# Altium PCB R20_PCBM.PcbDoc
Units mm, origin at the board's own origin, x right, y up, seen from the top; angles counter-clockwise.
Board outline 52 x 52 mm, 4 copper layers (Top Layer, Mid-Layer 1, Mid-Layer 2, Bottom Layer); 6 components, 2 nets, 22 pads, 245 vias.
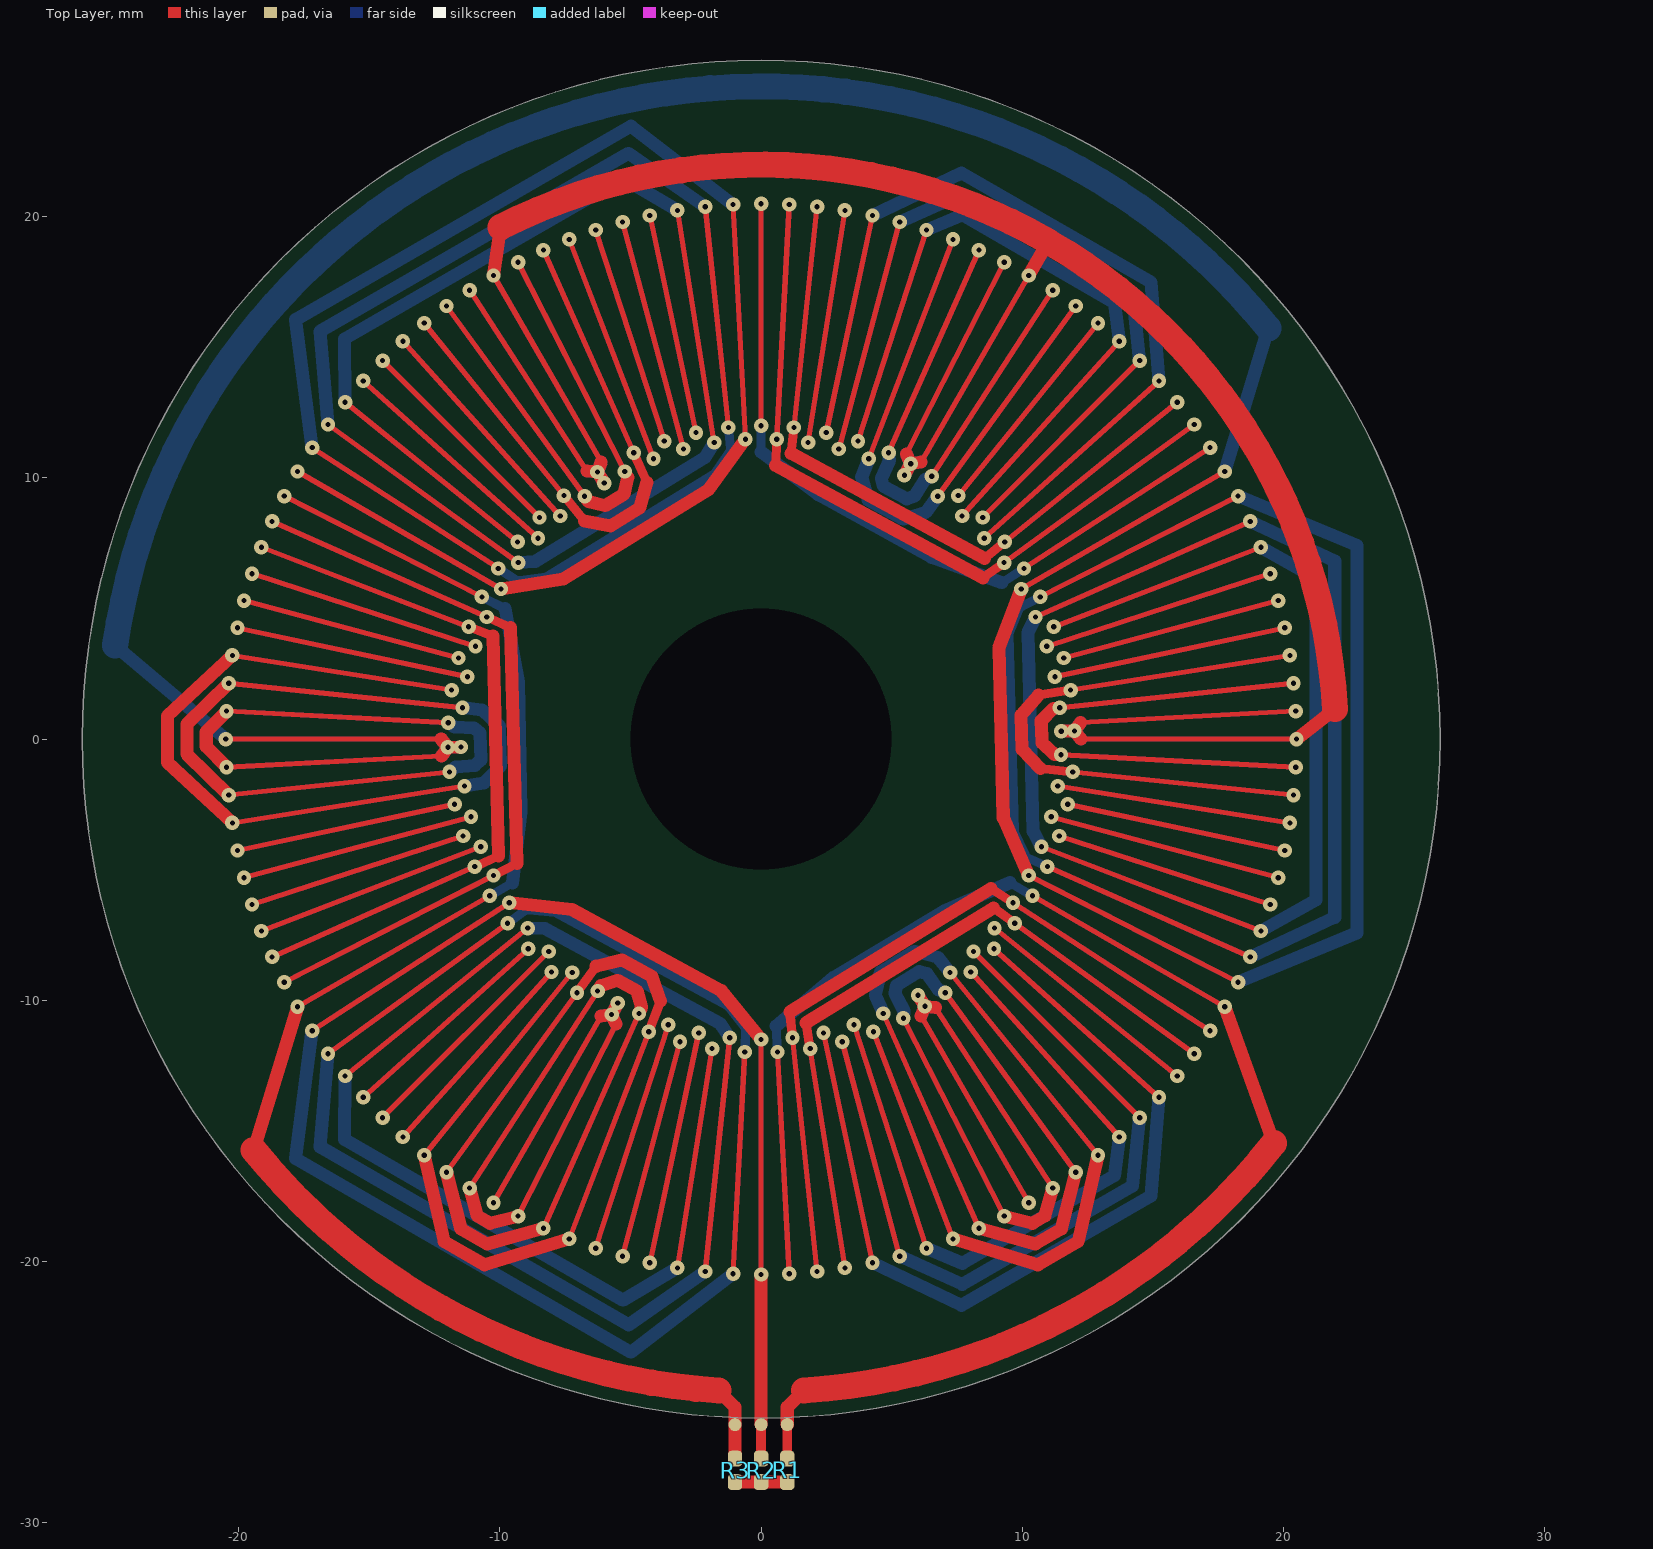
[diagram p0: Top Layer view]
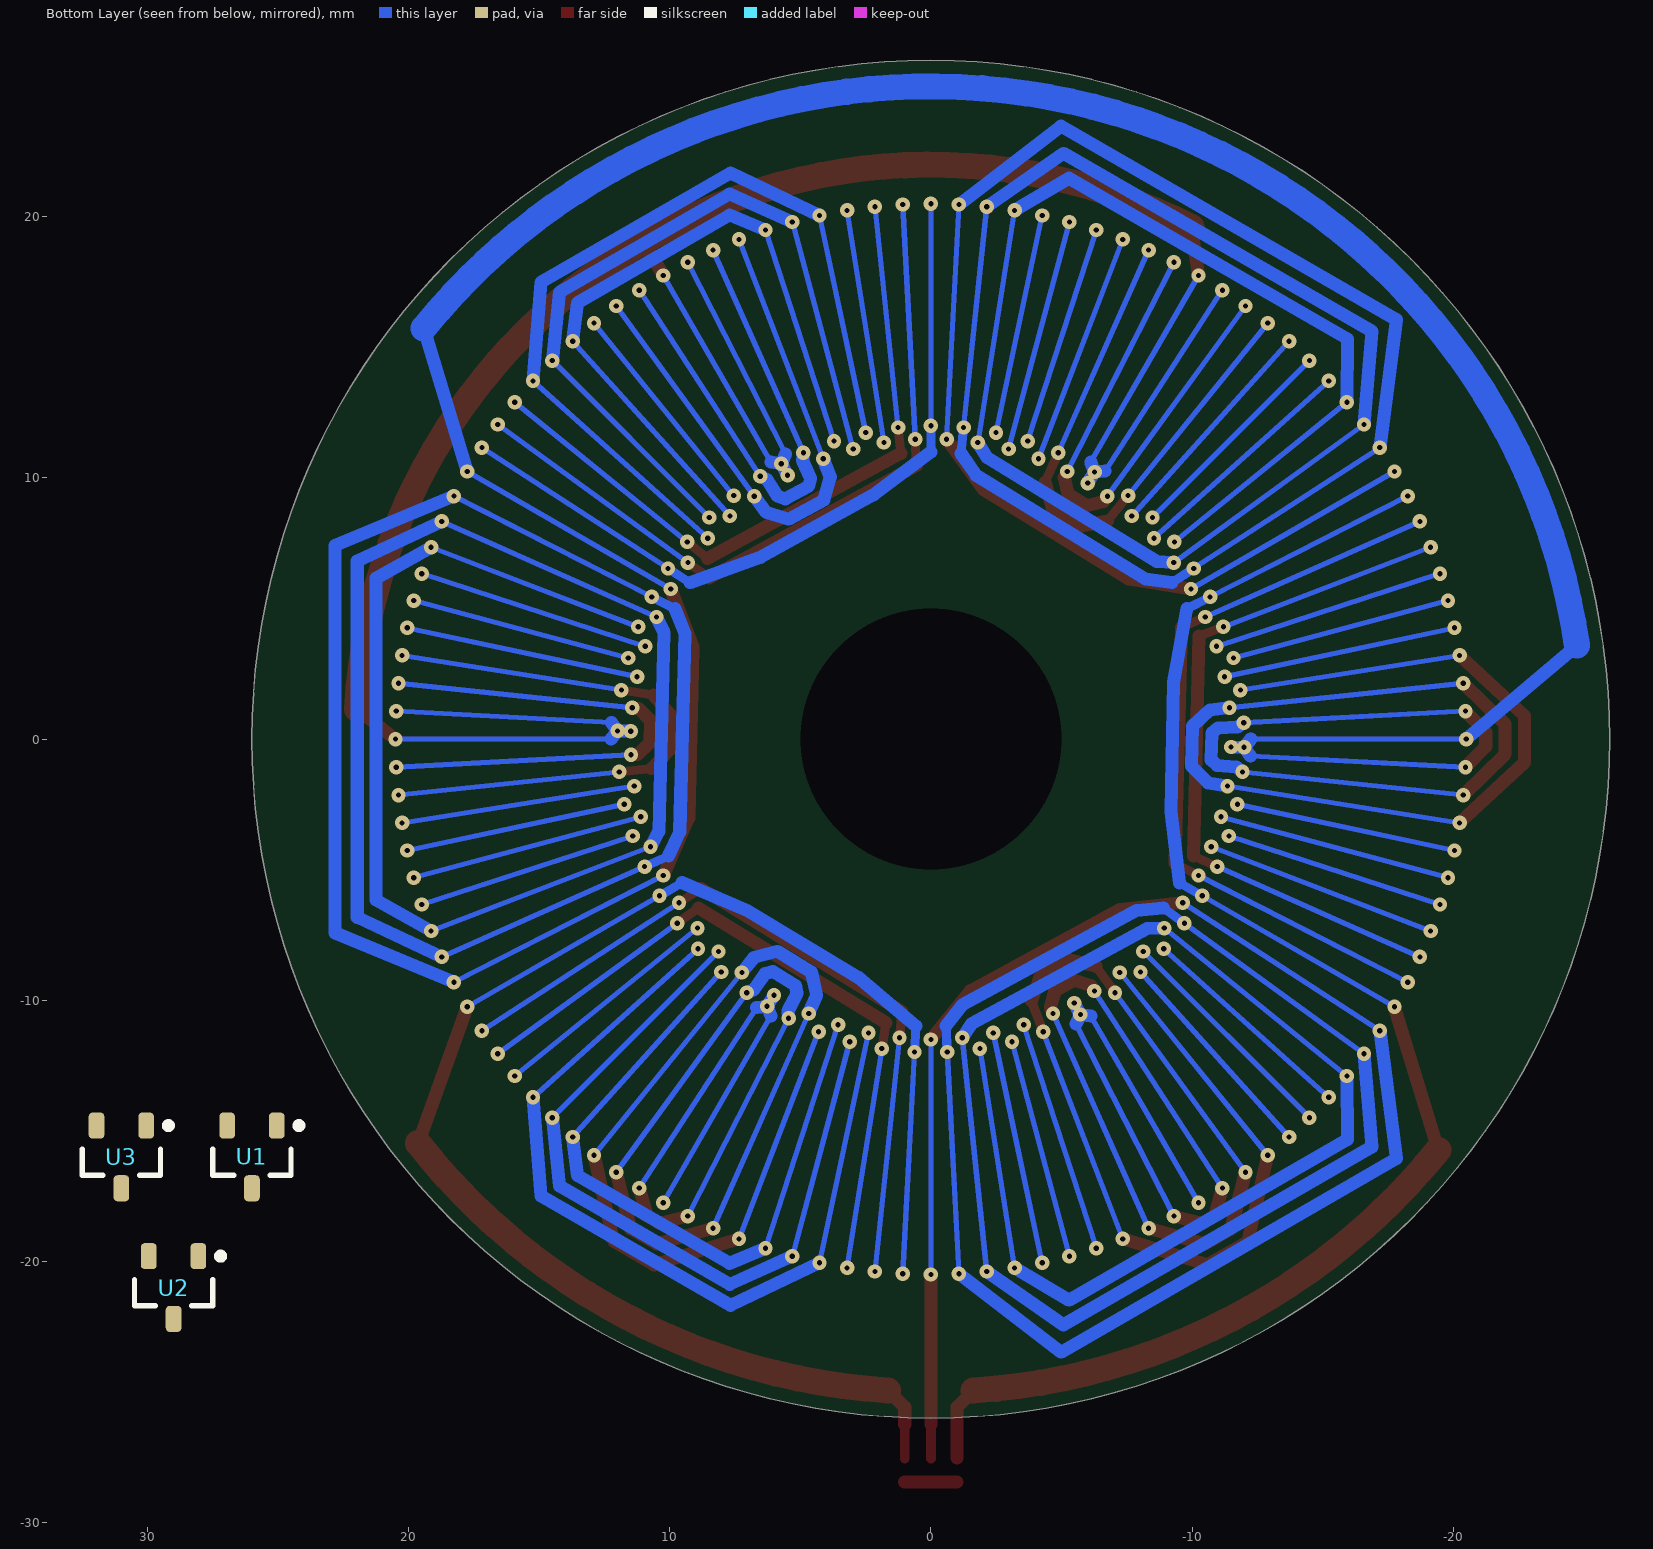
[diagram p1: Bottom Layer view, seen from below]
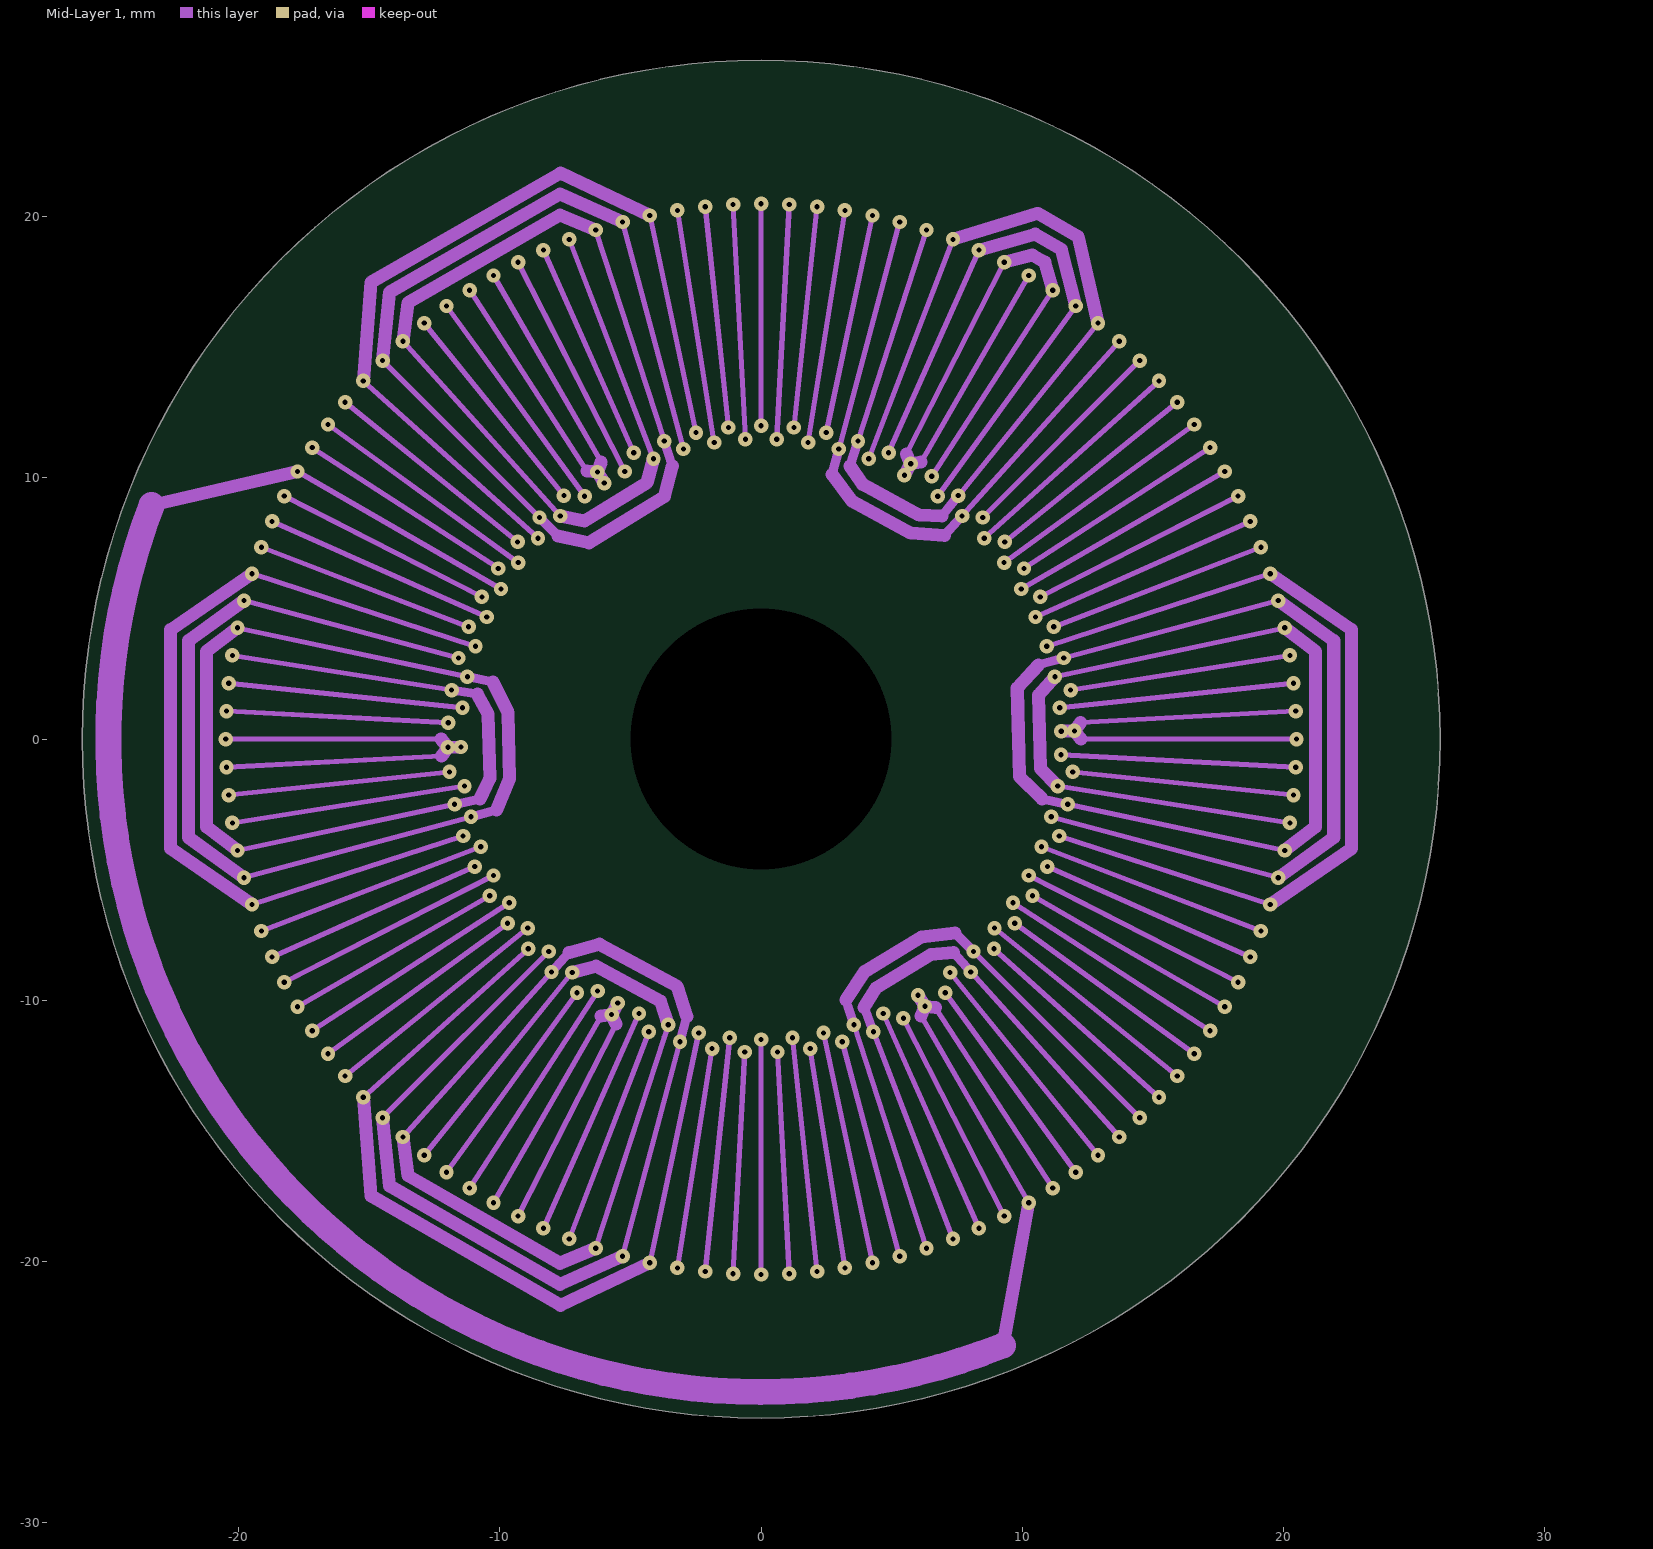
[diagram p2: Mid-Layer 1]
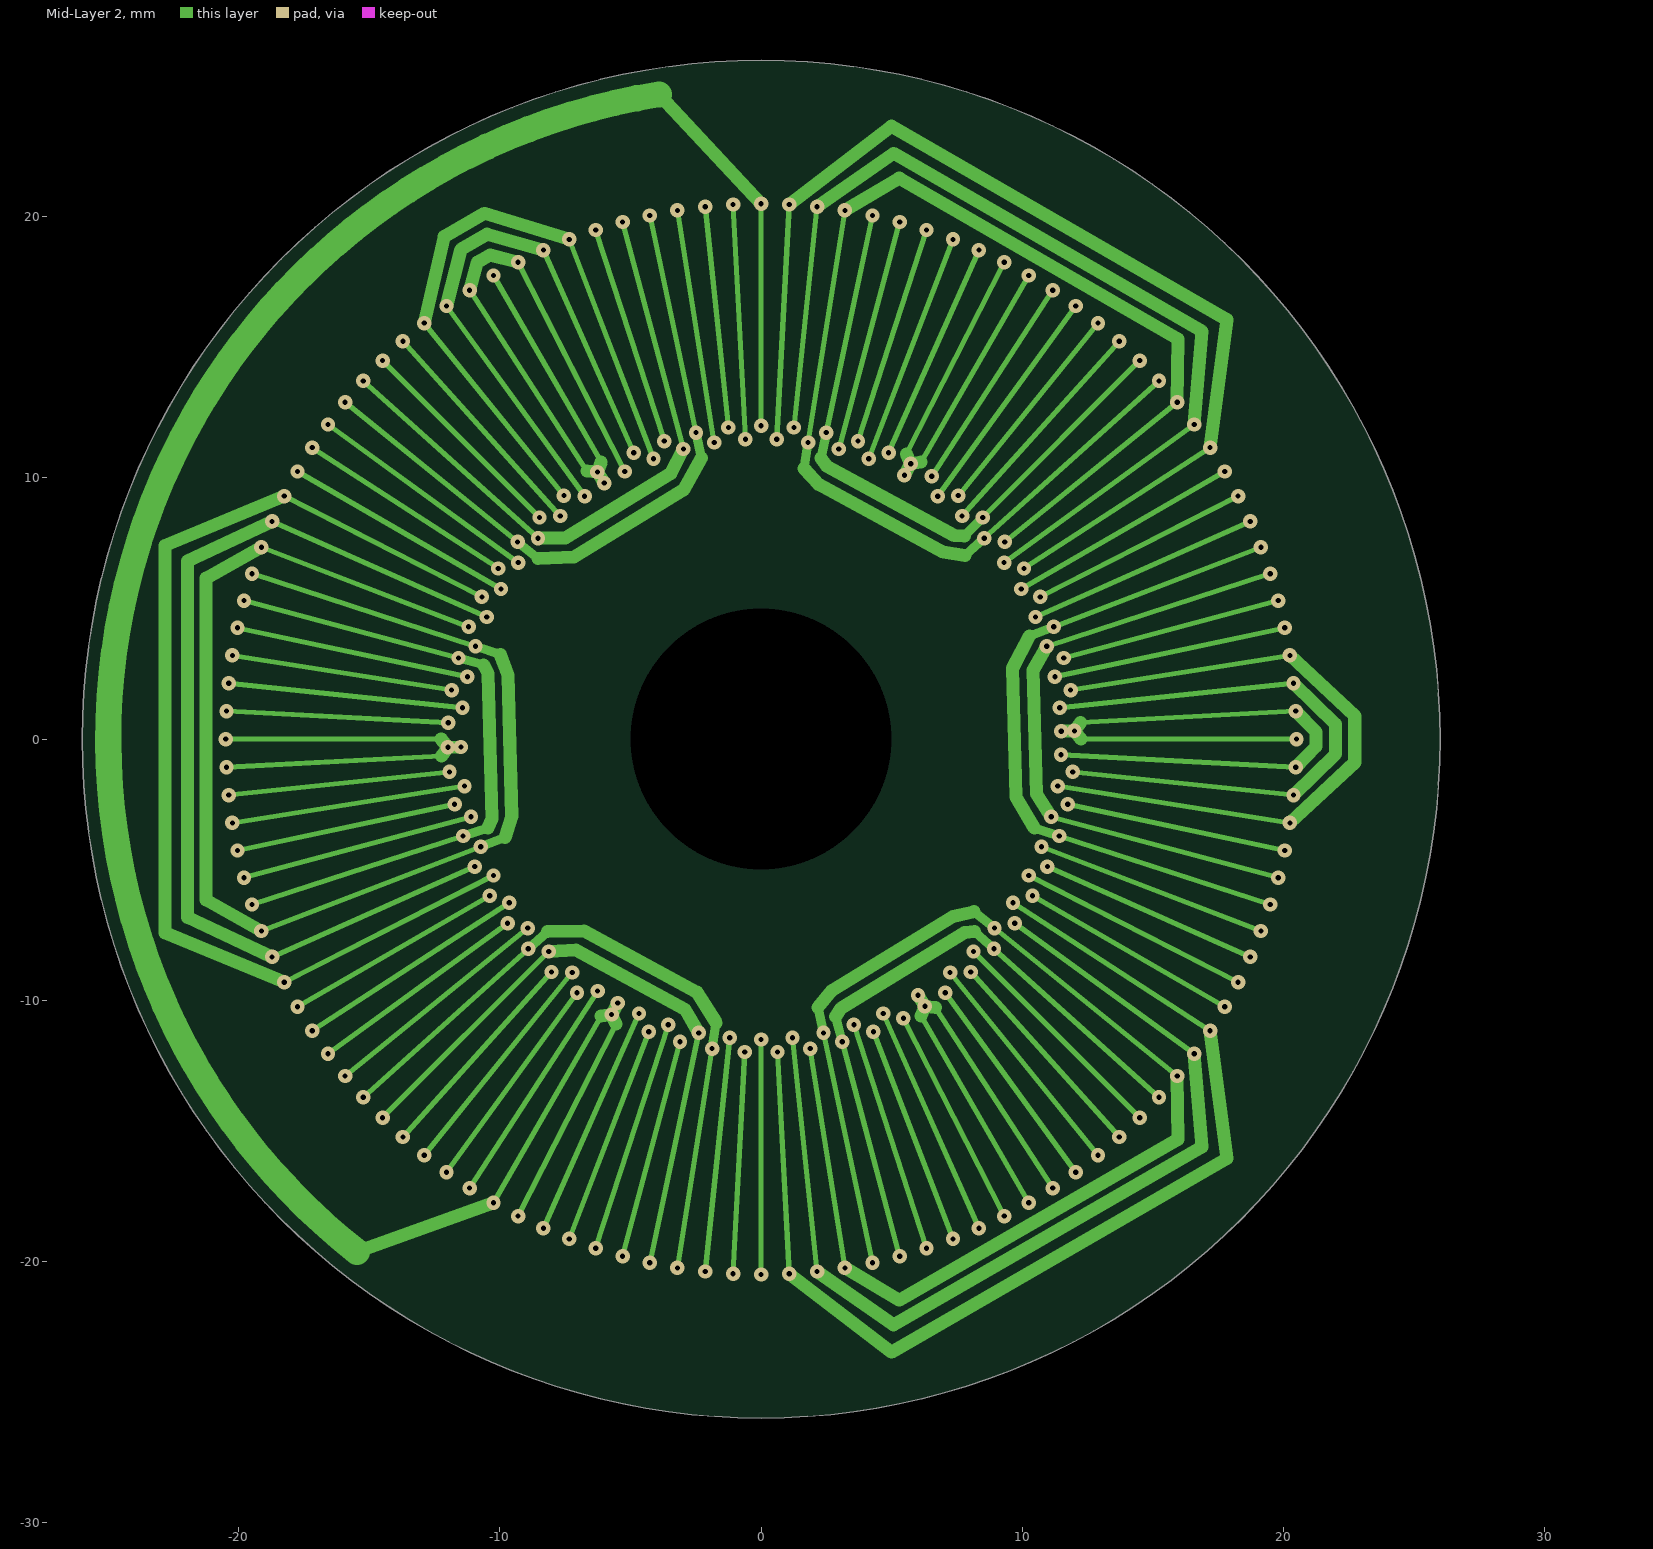
[diagram p3: Mid-Layer 2]

## Layer stack, top to bottom
Top Solder: solder mask 0.0102, Solder Resist, Dk 3.5
Top Layer: signal copper 0.0356
Dielectric 1: dielectric 0.32, FR-4, Dk 4.8
Mid-Layer 1: signal copper 0.0356
Dielectric3: dielectric 0.32, FR-4, Dk 4.8
Mid-Layer 2: signal copper 0.0356
Dielectric2: dielectric 0.32, FR-4, Dk 4.8
Bottom Layer: signal copper 0.0356
Bottom Solder: solder mask 0.0102, Solder Resist, Dk 3.5

## Board outline
0,-26 cw(c0,0) -26,0 cw(c0,0) 0,26 cw(c0,0) 26,0 cw(c0,0)

## Design rules (kind name [scope] priority, off if disabled: settings)
BoardOutlineClearance [All] p1: gap=0.254 ignorepadtopadclearanceinfootprint=FALSE
Clearance [All] p1: gap=0.15 ignorepadtopadclearanceinfootprint=FALSE
HoleSize [All] p1: absolutevalues=TRUE maxlimit=10 minlimit=0.2 maxpercent=80.000 minpercent=20.000
MinimumSolderMaskSliver [All] p1: minsoldermaskwidth=0.1
PolygonConnect PolygonConnect_1 [HasFootprint('C*') or HasFootprint('R*') or HasFootprint('OLED_096_SSD1306') or HasFootprint('1X6P_CONN')] p1: connectstyle=Relief reliefconductorwidth=0.3 reliefentries=4 polygonreliefangle="90 Angle" airgapwidth=0.3
PolygonConnect [All] p2: connectstyle=Direct reliefconductorwidth=0.254 reliefentries=4 polygonreliefangle="90 Angle" airgapwidth=0.254
RoutingVias [All] p1: holewidth=0.3 width=0.7 viastyle="Through Hole" minholewidth=0.2 minwidth=0.55 maxholewidth=0.3 maxwidth=0.7
SilkToSilkClearance [All] p1: silktosilkclearance=0
SilkToSolderMaskClearance [IsPad] p1: minsilkscreentomaskgap=0.15 clearancetoexposedcopper=TRUE
SolderMaskExpansion SolderMaskExpansion_1 [IsVia] p1: expansion=-0.2 istentingtop=FALSE
SolderMaskExpansion [All] p2: expansion=0.05 istentingtop=FALSE
SupplyNets "Schematic Supply Nets_1" [InNet('GND')] p1: voltage=0.000
SupplyNets "Schematic Supply Nets" [InNet('+5')] p2: voltage=0.000
UnRoutedNet [All] p1: checkbadconnections=TRUE
Width [All] p1: maxlimit=1 minlimit=0.2 preferedwidth=0.2
25 further rules are at their usual default settings.

## Components (designator, comment, footprint, x,y, rotation, side; value= is the part's Value field where it differs from the comment)
R1 "Value" R0402 1,-28 r90 top
R2 "Value" R0402 0,-28 r90 top
R3 "Value" R0402 -1,-28 r90 top
U1 "DRV5015" SOT95P237X112-3N 26,-16 r270 bottom
U2 "DRV5015" SOT95P237X112-3N 29,-21 r270 bottom
U3 "DRV5015" SOT95P237X112-3N 31,-16 r270 bottom

## Footprints (in the part's own frame and the unit in brackets; to place one, negate y for a bottom-side part, rotate by r counter-clockwise, add the part's x,y. Pads: shape width x height; smd on the part's side, far side on the other; paste and mask are expansions set on the pad)
R0402 [mm] "Chip Resistor, 2-Leads, Body 1.00x0.50mm, IPC Medium Density"
  rrect50% 0.6x0.55 smd mask+0.05: 1(-0.45,0) 2(0.45,0)
  body extent -0.53,-0.28 0.53,0.28, height 0.25
SOT95P237X112-3N [mm] "SOT23, 3-Leads, Body 2.92x2.37mm, Pitch 0.95mm, IPC Medium Density"
  rrect50% 1x0.6 smd: 1(-1.2,0.95) 2(-1.2,-0.95) 3(1.2,0)
  silkscreen extent -1.32,-1.5 0.7,1.92, body extent -1.32,-1.52 1.32,1.52, height 1.12

## Part data
R1 R2 R3: library part R_0402, "0402 62.5mW"
U1 U2 U3: "Hall Effect Sensor, -3.7mT Min, 3.7mT Max, 0-20mA, Plastic/epoxy, Rectangular, Surface Mount", LCSC=C2152442, Manufacturer="Texas Instruments", Manufacturer Part Number=DRV5015A3QDBZR, Supplier Part Number=595-DRV5015A3QDBZR, Category="Integrated Circuits (ICs)", ComponentLink1Description=https://www.ti.com:443/lit/ds/symlink/drv5015.pdf?src-supplier=IHS+Markit, ComponentLink1URL=https://www.ti.com:443/lit/ds/symlink/drv5015.pdf?src-supplier=IHS+Markit, ComponentLink2Description=http://www.ti.com/general/docs/suppproductinfo.tsp?distId=10&amp;gotoUrl=http%3A%2F%2Fwww.ti.com%2Flit%2Fgpn%2Fdrv5015&src-supplier=Digikey, ComponentLink2URL=http://www.ti.com/general/docs/suppproductinfo.tsp?distId=10&amp;gotoUrl=http%3A%2F%2Fwww.ti.com%2Flit%2Fgpn%2Fdrv5015&src-supplier=Digikey, JESD-609 Code=e3, Pricing="1=0.25, 10=0.175, 50=0.175, 100=0.154, 1000=0.124, 10000=0.123 (USD)", Reach SVHC Compliant=Yes, RoHS=Yes, RoHS Compliant=Yes, Sensor Type="MAGNETIC FIELD SENSOR,HALL EFFECT", Stock=7485, Supplier=Mouser, Terminal Finish=Tin

## Free pads (board coordinates)
  round 0.5 smd paste-2539.97 mask+0.102: A(1,-26.25) A(1,-26.25) B(0,-26.25) B(0,-26.25) C(-1,-26.25) C(-1,-26.25)
  round 0.5 hole 10: A1(0,0)

## Via types
v1: diameter 0.55, hole 0.2, Top Layer to Bottom Layer, 245 vias

## Nets (pads, with @x,y where several pads share a name; then routed paths per layer and width w, separated by ;. In a path a pad name is that pad's centre, name@x,y a point inside that pad or via, vN(x,y) a via of type N, cw(c..) or ccw(c..) an arc to the next point about the centre after c; other vN are vias at no path point)
+5: pad.A pad.B pad.C R1.2 R2.2 R3.2 | length 5849.4
  Top Layer w0.2: v1(-20.5,0) -12.25,0 ; v1(-20.472,-1.073) -12.233,-0.641 ; v1(-20.472,1.073) v1(-11.984,0.628) ; v1(-20.388,-2.143) v1(-11.934,-1.254) ; v1(-20.388,2.143) v1(-11.437,1.202) ; v1(-20.248,-3.207) v1(-11.358,-1.799) ; v1(-20.248,3.207) v1(-11.852,1.877) ; v1(-20.052,-4.262) v1(-11.738,-2.495) ; v1(-20.052,4.262) v1(-11.249,2.391) ; v1(-19.801,-5.306) v1(-11.108,-2.976) ; v1(-19.801,5.306) v1(-11.591,3.106) ; v1(-19.497,-6.335) v1(-11.413,-3.708) ; v1(-19.497,6.335) v1(-10.937,3.554) ; v1(-19.138,-7.347) v1(-10.736,-4.121) ; v1(-19.138,7.347) v1(-11.203,4.3) ; v1(-18.728,-8.338) v1(-10.963,-4.881) ; v1(-18.728,8.338) v1(-10.506,4.677) ; v1(-18.266,-9.307) v1(-10.247,-5.221) ; v1(-18.266,9.307) v1(-10.692,5.448) ; v1(-17.754,-10.25) v1(-10.392,-6) ; v1(-17.754,10.25) v1(-9.959,5.75) ; v1(-17.193,-11.165) v1(-9.645,-6.263) ; v1(-17.193,11.165) v1(-10.064,6.536) ; v1(-16.585,-12.05) v1(-9.708,-7.053) ; v1(-16.585,12.05) v1(-9.304,6.76) ; v1(-15.931,-12.901) v1(-8.937,-7.237) ; v1(-15.931,12.901) v1(-9.326,7.552) ; v1(-15.234,-13.717) v1(-8.918,-8.03) ; v1(-15.234,13.717) v1(-8.546,7.695) ; v1(-14.496,-14.496) v1(-8.132,-8.132) ; v1(-14.496,14.496) v1(-8.485,8.485) ; v1(-13.717,-15.234) v1(-8.03,-8.918) ; v1(-13.717,15.234) v1(-7.695,8.546) ; v1(-12.901,-15.931) v1(-7.237,-8.937) ; v1(-12.901,15.931) v1(-7.552,9.326) ; v1(-12.05,-16.585) v1(-7.053,-9.708) ; v1(-12.05,16.585) v1(-6.76,9.304) ; v1(-11.165,-17.193) v1(-6.263,-9.645) ; v1(-11.165,17.193) -6.672,10.274 ; v1(-10.25,-17.754) -6.125,-10.609 ; v1(-10.25,17.754) -6.125,10.609 ; v1(-9.307,-18.266) -5.561,-10.915 ; v1(-9.307,18.266) v1(-5.221,10.247) ; v1(-8.338,-18.728) v1(-4.677,-10.506) ; v1(-8.338,18.728) v1(-4.881,10.963) ; v1(-7.347,-19.138) v1(-4.3,-11.203) ; v1(-7.347,19.138) v1(-4.121,10.736) ; v1(-6.335,-19.497) v1(-3.554,-10.937) ; v1(-6.335,19.497) v1(-3.708,11.413) ; v1(-5.306,-19.801) v1(-3.106,-11.591) ; v1(-5.306,19.801) v1(-2.976,11.108) ; v1(-4.262,-20.052) v1(-2.391,-11.249) ; v1(-4.262,20.052) v1(-2.495,11.738) ; v1(-3.207,-20.248) v1(-1.877,-11.852) ; v1(-3.207,20.248) v1(-1.799,11.358) ; v1(-2.143,-20.388) v1(-1.202,-11.437) ; v1(-2.143,20.388) v1(-1.254,11.934) ; v1(-1.073,-20.472) v1(-0.628,-11.984) ; v1(-1.073,20.472) v1(-0.602,11.484) ; v1(0,-20.5) v1(0,-11.5) ; v1(0,12) v1(0,20.5) ; v1(0.602,11.484) v1(1.073,20.472) ; v1(0.628,-11.984) v1(1.073,-20.472) ; v1(1.202,-11.437) v1(2.143,-20.388) ; v1(1.254,11.934) v1(2.143,20.388) ; v1(1.799,11.358) v1(3.207,20.248) ; v1(1.877,-11.852) v1(3.207,-20.248) ; v1(2.391,-11.249) v1(4.262,-20.052) ; v1(2.495,11.738) v1(4.262,20.052) ; v1(2.976,11.108) v1(5.306,19.801) ; v1(3.106,-11.591) v1(5.306,-19.801) ; v1(3.554,-10.937) v1(6.335,-19.497) ; v1(3.708,11.413) v1(6.335,19.497) ; v1(4.121,10.736) v1(7.347,19.138) ; v1(4.3,-11.203) v1(7.347,-19.138) ; v1(4.677,-10.506) v1(8.338,-18.728) ; v1(4.881,10.963) v1(8.338,18.728) ; v1(5.448,-10.692) v1(9.307,-18.266) ; 5.561,10.915 v1(9.307,18.266) ; 6.125,-10.609 v1(10.25,-17.754) ; 6.125,10.609 v1(10.25,17.754) ; v1(6.536,10.064) v1(11.165,17.193) ; 6.672,-10.274 v1(11.165,-17.193) ; v1(6.76,9.304) v1(12.05,16.585) ; v1(7.053,-9.708) v1(12.05,-16.585) ; v1(7.237,-8.937) v1(12.901,-15.931) ; v1(7.552,9.326) v1(12.901,15.931) ; v1(7.695,8.546) v1(13.717,15.234) ; v1(8.03,-8.918) v1(13.717,-15.234) ; v1(8.132,-8.132) v1(14.496,-14.496) ; v1(8.485,8.485) v1(14.496,14.496) ; v1(8.546,7.695) v1(15.234,13.717) ; v1(8.918,-8.03) v1(15.234,-13.717) ; v1(8.937,-7.237) v1(15.931,-12.901) ; v1(9.304,6.76) v1(16.585,12.05) ; v1(9.326,7.552) v1(15.931,12.901) ; v1(9.645,-6.263) v1(17.193,-11.165) ; v1(9.708,-7.053) v1(16.585,-12.05) ; v1(9.959,5.75) v1(17.754,10.25) ; v1(10.064,6.536) v1(17.193,11.165) ; v1(10.247,-5.221) v1(18.266,-9.307) ; v1(10.392,-6) v1(17.754,-10.25) ; v1(10.506,4.677) v1(18.728,8.338) ; v1(10.692,5.448) v1(18.266,9.307) ; v1(10.736,-4.121) v1(19.138,-7.347) ; v1(10.937,3.554) v1(19.497,6.335) ; v1(10.963,-4.881) v1(18.728,-8.338) ; v1(11.108,-2.976) v1(19.801,-5.306) ; v1(11.203,4.3) v1(19.138,7.347) ; v1(11.249,2.391) v1(20.052,4.262) ; v1(11.358,-1.799) v1(20.248,-3.207) ; v1(11.413,-3.708) v1(19.497,-6.335) ; v1(11.437,1.202) v1(20.388,2.143) ; v1(11.484,-0.602) v1(20.472,-1.073) ; v1@11.591,3.106 v1(19.801,5.306) ; v1(11.738,-2.495) v1(20.052,-4.262) ; v1(11.852,1.877) v1(20.248,3.207) ; v1(11.934,-1.254) v1(20.388,-2.143) ; 12.233,0.641 v1(20.472,1.073) ; 12.25,0 v1(20.5,0)
  Top Layer w0.35: v1(-11.203,4.3) -10.269,3.942 ; v1(-10.963,-4.881) -10.049,-4.474 ; v1(-10.506,4.677) -9.592,4.271 ; v1(-10.247,-5.221) -9.356,-4.767 ; v1(-7.552,9.326) -6.765,8.354 ; v1(-7.053,-9.708) -6.319,-8.697 ; v1(-4.881,10.963) -4.372,9.821 ; v1(-4.3,-11.203) -3.852,-10.036 ; 0.55,10.486 v1(0.602,11.484) ; 1.098,-10.442 v1(1.202,-11.437) ; 1.15,10.94 v1(1.254,11.934) ; 1.721,-10.865 v1(1.877,-11.852) ; 8.495,6.172 v1(9.304,6.76) ; 8.549,6.923 v1(9.326,7.552) ; 8.806,-5.719 v1(9.645,-6.263) ; 8.899,-6.466 v1(9.708,-7.053) ; 10.618,1.682 v1(11.852,1.877) ; 10.691,-1.124 v1(11.934,-1.254)
  Top Layer w0.381: pad.B@-0.054,-26.255 0,-26.309 R2.2 ; pad.A@0.996,-26.265 1,-26.269 R1.2
  Top Layer w0.5: v1(-20.472,-1.073) -21.248,-0.278 -21.248,0.278 v1(-20.472,1.073) ; v1(-20.388,-2.143) -21.992,-0.576 -21.992,0.576 v1(-20.388,2.143) ; v1(-20.248,-3.207) -22.732,-0.893 -22.732,0.893 v1(-20.248,3.207) ; -19.429,-15.733 v1(-17.754,-10.25) ; v1(-12.901,-15.931) -12.14,-19.24 -10.593,-20.133 v1(-7.347,-19.138) ; -12.25,0 v1(-11.996,-0.314) ; -12.233,-0.641 v1(-11.996,-0.314) ; v1(-12.05,-16.585) -11.495,-18.758 -10.497,-19.334 v1(-8.338,-18.728) ; v1(-11.496,-0.301) v1(-11.996,-0.314) ; v1(-11.165,-17.193) -10.865,-18.262 -10.383,-18.541 v1(-9.307,-18.266) ; -10.269,3.942 -10.049,-4.474 ; v1(-10.25,17.754) -9.988,19.602 ; v1(-9.959,5.75) -7.577,6.136 -2.027,9.537 v1(-0.602,11.484) ; v1(-9.645,-6.263) -7.246,-6.524 -1.525,-9.63 v1(0,-11.5) ; -9.592,4.271 -9.356,-4.767 ; -6.765,8.354 -5.771,8.166 -4.656,8.85 -4.372,9.821 ; v1(-6.76,9.304) -6.613,9.101 -5.972,8.938 -5.253,9.379 -5.107,10.024 v1(-5.221,10.247) ; -6.672,10.274 v1(-6.27,10.232) ; -6.319,-8.697 -5.336,-8.457 -4.187,-9.081 -3.852,-10.036 ; v1(-6.263,-9.645) -6.127,-9.435 -5.496,-9.239 -4.755,-9.641 -4.576,-10.277 v1(-4.677,-10.506) ; -6.125,-10.609 v1(-5.726,-10.546) ; -6.125,10.609 v1(-6.27,10.232) ; v1(-6.009,9.805) v1(-6.27,10.232) ; -5.561,-10.915 v1(-5.726,-10.546) ; v1(-5.487,-10.106) v1(-5.726,-10.546) ; R3.2@-1,-27.525 pad.C@-1,-26.25 ; 0.55,10.486 8.495,6.172 ; 1.098,-10.442 8.806,-5.719 ; 1.15,10.94 8.549,6.923 ; 1.721,-10.865 8.899,-6.466 ; v1(5.487,10.106) v1(5.726,10.546) ; 5.561,10.915 v1(5.726,10.546) ; v1(6.009,-9.805) v1(6.27,-10.232) ; 6.125,-10.609 v1(6.27,-10.232) ; 6.125,10.609 v1(5.726,10.546) ; 6.672,-10.274 v1(6.27,-10.232) ; v1(7.347,-19.138) 10.593,-20.133 12.14,-19.24 v1(12.901,-15.931) ; v1(8.338,-18.728) 10.497,-19.334 11.495,-18.758 v1(12.05,-16.585) ; v1(9.307,-18.266) 10.383,-18.541 10.865,-18.262 v1(11.165,-17.193) ; v1(9.959,5.75) 9.102,3.494 9.273,-3.013 v1(10.247,-5.221) ; v1(10.25,17.754) 11,19.053 ; 10.618,1.682 9.958,0.915 9.992,-0.393 10.691,-1.124 ; v1(11.437,1.202) 11.188,1.176 10.727,0.703 10.749,-0.141 11.235,-0.589 v1(11.484,-0.602) ; v1(11.496,0.301) v1(11.996,0.314) ; 12.233,0.641 v1(11.996,0.314) ; 12.25,0 v1(11.996,0.314) ; v1(17.754,-10.25) 19.633,-15.477 ; v1(20.5,0) 21.97,1.151 ; pad.C@-1,-26.25 -1,-25.582 ; pad.C@-1,-26.25 -1,-25.582 ; -1,-25.582 -1.635,-24.946 -1,-25.582 ; 1,-25.581 1,-26.25 1,-25.581 ; 1,-25.581 1.635,-24.946 1,-25.581 ; pad.B@0,-26.25 v1(0,-20.5) pad.B@0,-26.25
  Top Layer w1: -19.429,-15.733 ccw(c0,0) -1.635,-24.946 ; -9.988,19.602 cw(c0,0) 21.97,1.151 ; 1.635,-24.946 ccw(c0,0) 19.633,-15.477
  Mid-Layer 1 w0.2: v1(-20.5,0) -12.25,0 ; v1(-20.472,-1.073) -12.233,-0.641 ; v1(-20.472,1.073) v1(-11.984,0.628) ; v1(-20.388,-2.143) v1(-11.934,-1.254) ; v1(-20.388,2.143) v1(-11.437,1.202) ; v1(-20.248,-3.207) v1(-11.358,-1.799) ; v1(-20.248,3.207) v1(-11.852,1.877) ; v1(-20.052,-4.262) v1(-11.738,-2.495) ; v1(-20.052,4.262) v1(-11.249,2.391) ; v1(-19.801,-5.306) v1(-11.108,-2.976) ; v1(-19.801,5.306) v1(-11.591,3.106) ; v1(-19.497,-6.335) v1(-11.413,-3.708) ; v1(-19.497,6.335) v1(-10.937,3.554) ; v1(-19.138,-7.347) v1(-10.736,-4.121) ; v1(-19.138,7.347) v1(-11.203,4.3) ; v1(-18.728,-8.338) v1(-10.963,-4.881) ; v1(-18.728,8.338) v1(-10.506,4.677) ; v1(-18.266,-9.307) v1(-10.247,-5.221) ; v1(-18.266,9.307) v1(-10.692,5.448) ; v1(-17.754,-10.25) v1(-10.392,-6) ; v1(-17.754,10.25) v1(-9.959,5.75) ; v1(-17.193,-11.165) v1(-9.645,-6.263) ; v1(-17.193,11.165) v1(-10.064,6.536) ; v1(-16.585,-12.05) v1(-9.708,-7.053) ; v1(-16.585,12.05) v1(-9.304,6.76) ; v1(-15.931,-12.901) v1(-8.937,-7.237) ; v1(-15.931,12.901) v1(-9.326,7.552) ; v1(-15.234,-13.717) v1(-8.918,-8.03) ; v1(-15.234,13.717) v1(-8.546,7.695) ; v1(-14.496,-14.496) v1(-8.132,-8.132) ; v1(-14.496,14.496) v1(-8.485,8.485) ; v1(-13.717,-15.234) v1(-8.03,-8.918) ; v1(-13.717,15.234) -8.03,8.918 v1(-7.695,8.546) ; v1(-12.901,-15.931) v1(-7.237,-8.937) ; v1(-12.901,15.931) v1(-7.552,9.326) ; v1(-12.05,-16.585) v1(-7.053,-9.708) ; v1(-12.05,16.585) v1(-6.76,9.304) ; v1(-11.165,-17.193) v1(-6.263,-9.645) ; v1(-11.165,17.193) -6.672,10.274 ; v1(-10.25,-17.754) -6.125,-10.609 ; v1(-10.25,17.754) -6.125,10.609 ; v1(-9.307,-18.266) -5.561,-10.915 ; v1(-9.307,18.266) v1(-5.221,10.247) ; v1(-8.338,-18.728) v1(-4.677,-10.506) ; v1(-8.338,18.728) v1(-4.881,10.963) ; v1(-7.347,-19.138) v1(-4.3,-11.203) ; v1(-7.347,19.138) v1(-4.121,10.736) ; v1(-6.335,-19.497) -3.708,-11.413 v1(-3.554,-10.937) ; v1(-6.335,19.497) v1(-3.708,11.413) ; v1(-5.306,-19.801) v1(-3.106,-11.591) ; v1(-5.306,19.801) v1(-2.976,11.108) ; v1(-4.262,-20.052) v1(-2.391,-11.249) ; v1(-4.262,20.052) v1(-2.495,11.738) ; v1(-3.207,-20.248) v1(-1.877,-11.852) ; v1(-3.207,20.248) v1(-1.799,11.358) ; v1(-2.143,-20.388) v1(-1.202,-11.437) ; v1(-2.143,20.388) v1(-1.254,11.934) ; v1(-1.073,-20.472) v1(-0.628,-11.984) ; v1(-1.073,20.472) v1(-0.602,11.484) ; v1(0,-20.5) v1(0,-11.5) ; v1(0,12) v1(0,20.5) ; v1(0.602,11.484) v1(1.073,20.472) ; v1(0.628,-11.984) v1(1.073,-20.472) ; v1(1.202,-11.437) v1(2.143,-20.388) ; v1(1.254,11.934) v1(2.143,20.388) ; v1(1.799,11.358) v1(3.207,20.248) ; v1(1.877,-11.852) v1(3.207,-20.248) ; v1(2.391,-11.249) v1(4.262,-20.052) ; v1(2.495,11.738) v1(4.262,20.052) ; v1(2.976,11.108) v1(5.306,19.801) ; v1(3.106,-11.591) v1(5.306,-19.801) ; v1(3.554,-10.937) v1(6.335,-19.497) ; v1(3.708,11.413) v1(6.335,19.497) ; v1(4.121,10.736) v1(7.347,19.138) ; v1(4.3,-11.203) v1(7.347,-19.138) ; v1(4.677,-10.506) v1(8.338,-18.728) ; v1(4.881,10.963) v1(8.338,18.728) ; v1(5.448,-10.692) v1(9.307,-18.266) ; 5.561,10.915 v1(9.307,18.266) ; 6.125,-10.609 v1(10.25,-17.754) ; 6.125,10.609 v1(10.25,17.754) ; v1(6.536,10.064) v1(11.165,17.193) ; 6.672,-10.274 v1(11.165,-17.193) ; v1(6.76,9.304) v1(12.05,16.585) ; v1(7.053,-9.708) v1(12.05,-16.585) ; v1(7.237,-8.937) v1(12.901,-15.931) ; v1(7.552,9.326) v1(12.901,15.931) ; v1(7.695,8.546) v1(13.717,15.234) ; v1(8.03,-8.918) v1(13.717,-15.234) ; v1(8.132,-8.132) v1(14.496,-14.496) ; v1(8.485,8.485) v1(14.496,14.496) ; v1(8.546,7.695) v1(15.234,13.717) ; v1(8.918,-8.03) v1(15.234,-13.717) ; v1(8.937,-7.237) v1(15.931,-12.901) ; v1(9.304,6.76) v1(16.585,12.05) ; v1(9.326,7.552) v1(15.931,12.901) ; v1(9.645,-6.263) v1(17.193,-11.165) ; v1(9.708,-7.053) v1(16.585,-12.05) ; v1(9.959,5.75) v1(17.754,10.25) ; v1(10.064,6.536) v1(17.193,11.165) ; v1(10.247,-5.221) v1(18.266,-9.307) ; v1(10.392,-6) v1(17.754,-10.25) ; v1(10.506,4.677) v1(18.728,8.338) ; v1(10.692,5.448) v1(18.266,9.307) ; v1(10.736,-4.121) v1(19.138,-7.347) ; v1(10.937,3.554) v1(19.497,6.335) ; v1(10.963,-4.881) v1(18.728,-8.338) ; v1(11.108,-2.976) v1(19.801,-5.306) ; v1(11.203,4.3) v1(19.138,7.347) ; v1(11.249,2.391) 11.738,2.495 v1(20.052,4.262) ; v1(11.358,-1.799) v1(20.248,-3.207) ; v1(11.413,-3.708) v1(19.497,-6.335) ; v1(11.437,1.202) v1(20.388,2.143) ; v1(11.484,-0.602) v1(20.472,-1.073) ; v1(11.591,3.106) v1(19.801,5.306) ; v1(11.738,-2.495) v1(20.052,-4.262) ; v1(11.852,1.877) v1(20.248,3.207) ; v1(11.934,-1.254) v1(20.388,-2.143) ; 12.233,0.641 v1(20.472,1.073) ; 12.25,0 v1(20.5,0)
  Mid-Layer 1 w0.35: v1(-11.852,1.877) -10.865,1.721 ; v1(-11.738,-2.495) -10.76,-2.287 ; v1(-11.249,2.391) -10.271,2.183 ; v1(-11.108,-2.976) -10.142,-2.718 ; v1(-8.485,8.485) -7.778,7.778 ; v1(-8.03,-8.918) -7.36,-8.175 ; v1(-3.708,11.413) -3.399,10.462 ; v1(-3.106,-11.591) -2.847,-10.625 ; 2.718,10.142 v1(2.976,11.108) ; 3.245,-9.986 v1(3.554,-10.937) ; 3.399,10.462 v1(3.708,11.413) ; 3.942,-10.269 v1(4.3,-11.203) ; 6.923,8.549 v1(7.552,9.326) ; 7.026,7.803 v1(7.695,8.546) ; 7.36,-8.175 v1(8.03,-8.918) ; 7.425,-7.425 v1(8.132,-8.132) ; 10.625,2.847 v1(11.591,3.106) ; 10.76,-2.287 v1(11.738,-2.495)
  Mid-Layer 1 w0.5: -23.339,8.959 v1(-17.754,10.25) ; v1(-20.052,-4.262) -21.235,-3.363 -21.235,3.363 v1(-20.052,4.262) ; v1(-19.801,-5.306) -21.929,-3.768 -21.929,3.768 v1(-19.801,5.306) ; v1(-19.497,-6.335) -22.615,-4.191 -22.615,4.191 v1(-19.497,6.335) ; v1(-15.234,-13.717) -14.937,-17.489 -7.678,-21.681 v1(-4.262,-20.052) ; v1(-15.234,13.717) -14.937,17.489 -7.678,21.681 v1(-4.262,20.052) ; v1(-14.496,-14.496) -14.227,-17.107 -7.701,-20.875 v1(-5.306,-19.801) ; v1(-14.496,14.496) -14.227,17.107 -7.701,20.875 v1(-5.306,19.801) ; v1(-13.717,-15.234) -13.53,-16.709 -7.705,-20.072 v1(-6.335,-19.497) ; v1(-13.717,15.234) -13.53,16.709 -7.705,20.072 v1(-6.335,19.497) ; -12.25,0 v1(-11.996,-0.314) ; -12.233,-0.641 v1(-11.996,-0.314) ; v1(-11.496,-0.301) v1(-11.996,-0.314) ; -10.865,1.721 -10.456,0.961 -10.391,-1.507 -10.76,-2.287 ; -10.271,2.183 -9.697,1.019 -9.63,-1.525 -10.142,-2.718 ; -7.778,7.778 -6.593,7.518 -3.706,9.288 -3.399,10.462 ; v1(-7.695,8.546) -6.765,8.354 -4.372,9.821 v1(-4.121,10.736) ; -7.36,-8.175 -6.191,-7.853 -3.214,-9.469 -2.847,-10.625 ; v1(-7.237,-8.937) -6.319,-8.697 -3.852,-10.036 v1(-3.554,-10.937) ; -6.672,10.274 v1(-6.27,10.232) ; -6.125,-10.609 v1(-5.726,-10.546) ; -6.125,10.609 v1(-6.27,10.232) ; v1(-6.009,9.805) v1(-6.27,10.232) ; -5.561,-10.915 v1(-5.726,-10.546) ; v1(-5.487,-10.106) v1(-5.726,-10.546) ; 2.718,10.142 3.494,9.102 5.731,7.888 7.026,7.803 ; 3.245,-9.986 3.966,-8.907 6.136,-7.577 7.425,-7.425 ; 3.399,10.462 3.891,9.752 6.06,8.575 6.923,8.549 ; 3.942,-10.269 4.396,-9.535 6.5,-8.246 7.36,-8.175 ; v1(5.487,10.106) v1(5.726,10.546) ; 5.561,10.915 v1(5.726,10.546) ; v1(6.009,-9.805) v1(6.27,-10.232) ; 6.125,-10.609 v1(6.27,-10.232) ; 6.125,10.609 v1(5.726,10.546) ; 6.672,-10.274 v1(6.27,-10.232) ; v1(7.347,19.138) 10.593,20.133 12.14,19.24 v1(12.901,15.931) ; v1(8.338,18.728) 10.497,19.334 11.495,18.758 v1(12.05,16.585) ; 9.264,-23.22 v1(10.25,-17.754) ; v1(9.307,18.266) 10.383,18.54 10.865,18.262 v1(11.165,17.193) ; 10.625,2.847 9.808,1.951 9.896,-1.435 10.76,-2.287 ; v1(11.249,2.391) 10.618,1.682 10.691,-1.124 v1(11.358,-1.799) ; v1(11.496,0.301) v1(11.996,0.314) ; 12.233,0.641 v1(11.996,0.314) ; 12.25,0 v1(11.996,0.314) ; v1(19.497,-6.335) 22.615,-4.191 22.615,4.191 v1(19.497,6.335) ; v1(19.801,-5.306) 21.929,-3.768 21.929,3.768 v1(19.801,5.306) ; v1(20.052,-4.262) 21.235,-3.363 21.235,3.363 v1(20.052,4.262)
  Mid-Layer 1 w1: -23.339,8.959 ccw(c0,0) 9.264,-23.22 cw(c0,0) -23.339,8.959
  Mid-Layer 2 w0.2: v1(-20.5,0) -12.25,0 ; v1(-20.472,-1.073) -12.233,-0.641 ; v1(-20.472,1.073) v1(-11.984,0.628) ; v1(-20.388,-2.143) v1(-11.934,-1.254) ; v1(-20.388,2.143) v1(-11.437,1.202) ; v1(-20.248,-3.207) v1(-11.358,-1.799) ; v1(-20.248,3.207) v1(-11.852,1.877) ; v1(-20.052,-4.262) v1(-11.738,-2.495) ; v1(-20.052,4.262) v1(-11.249,2.391) ; v1(-19.801,-5.306) v1(-11.108,-2.976) ; v1(-19.801,5.306) v1(-11.591,3.106) ; v1(-19.497,-6.335) v1(-11.413,-3.708) ; v1(-19.497,6.335) v1(-10.937,3.554) ; v1(-19.138,-7.347) v1(-10.736,-4.121) ; v1(-19.138,7.347) v1(-11.203,4.3) ; v1(-18.728,-8.338) v1(-10.963,-4.881) ; v1(-18.728,8.338) v1(-10.506,4.677) ; v1(-18.266,-9.307) v1(-10.247,-5.221) ; v1(-18.266,9.307) v1(-10.692,5.448) ; v1(-17.754,-10.25) v1(-10.392,-6) ; v1(-17.754,10.25) v1(-9.959,5.75) ; v1(-17.193,-11.165) v1(-9.645,-6.263) ; v1(-17.193,11.165) v1(-10.064,6.536) ; v1(-16.585,-12.05) v1(-9.708,-7.053) ; v1(-16.585,12.05) v1(-9.304,6.76) ; v1(-15.931,-12.901) v1(-8.937,-7.237) ; v1(-15.931,12.901) v1(-9.326,7.552) ; v1(-15.234,-13.717) v1(-8.918,-8.03) ; v1(-15.234,13.717) v1(-8.546,7.695) ; v1(-14.496,-14.496) v1(-8.132,-8.132) ; v1(-14.496,14.496) v1(-8.485,8.485) ; v1(-13.717,-15.234) v1(-8.03,-8.918) ; v1(-13.717,15.234) v1(-7.695,8.546) ; v1(-12.901,-15.931) v1(-7.237,-8.937) ; v1(-12.901,15.931) v1(-7.552,9.326) ; v1(-12.05,-16.585) v1(-7.053,-9.708) ; v1(-12.05,16.585) v1(-6.76,9.304) ; v1(-11.165,-17.193) v1(-6.263,-9.645) ; v1(-11.165,17.193) -6.672,10.274 ; v1(-10.25,-17.754) -6.125,-10.609 ; v1(-10.25,17.754) -6.125,10.609 ; v1(-9.307,-18.266) -5.561,-10.915 ; v1(-9.307,18.266) v1(-5.221,10.247) ; v1(-8.338,-18.728) v1(-4.677,-10.506) ; v1(-8.338,18.728) v1(-4.881,10.963) ; v1(-7.347,-19.138) v1(-4.3,-11.203) ; v1(-7.347,19.138) v1(-4.121,10.736) ; v1(-6.335,-19.497) v1(-3.554,-10.937) ; v1(-6.335,19.497) v1(-3.708,11.413) ; v1(-5.306,-19.801) v1(-3.106,-11.591) ; v1(-5.306,19.801) v1(-2.976,11.108) ; v1(-4.262,-20.052) v1(-2.391,-11.249) ; v1(-4.262,20.052) v1(-2.495,11.738) ; v1(-3.207,-20.248) v1(-1.877,-11.852) ; v1(-3.207,20.248) v1(-1.799,11.358) ; v1(-2.143,-20.388) v1(-1.202,-11.437) ; v1(-2.143,20.388) v1(-1.254,11.934) ; v1(-1.073,-20.472) v1(-0.628,-11.984) ; v1(-1.073,20.472) v1(-0.602,11.484) ; v1(0,-20.5) v1(0,-11.5) ; v1(0,12) v1(0,20.5) ; v1(0.602,11.484) v1(1.073,20.472) ; v1(0.628,-11.984) v1(1.073,-20.472) ; v1(1.202,-11.437) v1(2.143,-20.388) ; v1(1.254,11.934) v1(2.143,20.388) ; v1(1.799,11.358) v1(3.207,20.248) ; v1(1.877,-11.852) v1(3.207,-20.248) ; v1(2.391,-11.249) v1(4.262,-20.052) ; v1(2.495,11.738) v1(4.262,20.052) ; v1(2.976,11.108) v1(5.306,19.801) ; v1(3.106,-11.591) v1(5.306,-19.801) ; v1(3.554,-10.937) v1(6.335,-19.497) ; v1(3.708,11.413) v1(6.335,19.497) ; v1(4.121,10.736) v1(7.347,19.138) ; v1(4.3,-11.203) v1(7.347,-19.138) ; v1(4.677,-10.506) v1(8.338,-18.728) ; v1(4.881,10.963) v1(8.338,18.728) ; v1(5.448,-10.692) v1(9.307,-18.266) ; 5.561,10.915 v1(9.307,18.266) ; 6.125,-10.609 v1(10.25,-17.754) ; 6.125,10.609 v1(10.25,17.754) ; v1(6.536,10.064) v1(11.165,17.193) ; 6.672,-10.274 v1(11.165,-17.193) ; v1(6.76,9.304) v1(12.05,16.585) ; v1(7.053,-9.708) v1(12.05,-16.585) ; v1(7.237,-8.937) v1(12.901,-15.931) ; v1(7.552,9.326) v1(12.901,15.931) ; v1(7.695,8.546) v1(13.717,15.234) ; v1(8.03,-8.918) v1(13.717,-15.234) ; v1(8.132,-8.132) v1(14.496,-14.496) ; v1(8.485,8.485) v1(14.496,14.496) ; v1(8.546,7.695) v1(15.234,13.717) ; v1(8.918,-8.03) v1(15.234,-13.717) ; v1(8.937,-7.237) v1(15.931,-12.901) ; v1(9.304,6.76) v1(16.585,12.05) ; v1(9.326,7.552) v1(15.931,12.901) ; v1(9.645,-6.263) v1(17.193,-11.165) ; v1(9.708,-7.053) v1(16.585,-12.05) ; v1(9.959,5.75) v1(17.754,10.25) ; v1(10.064,6.536) v1(17.193,11.165) ; v1(10.247,-5.221) v1(18.266,-9.307) ; v1(10.392,-6) v1(17.754,-10.25) ; v1(10.506,4.677) v1(18.728,8.338) ; v1(10.692,5.448) v1(18.266,9.307) ; v1(10.736,-4.121) v1(19.138,-7.347) ; v1(10.937,3.554) v1(19.497,6.335) ; v1(10.963,-4.881) v1(18.728,-8.338) ; v1(11.108,-2.976) v1(19.801,-5.306) ; v1(11.203,4.3) v1(19.138,7.347) ; v1(11.249,2.391) v1(20.052,4.262) ; v1(11.358,-1.799) v1(20.248,-3.207) ; v1(11.413,-3.708) v1(19.497,-6.335) ; v1(11.437,1.202) v1(20.388,2.143) ; v1(11.484,-0.602) v1(20.472,-1.073) ; v1(11.591,3.106) v1(19.801,5.306) ; v1(11.738,-2.495) v1(20.052,-4.262) ; v1(11.852,1.877) v1(20.248,3.207) ; v1(11.934,-1.254) v1(20.388,-2.143) ; 12.233,0.641 v1(20.472,1.073) ; 12.25,0 v1(20.5,0)
  Mid-Layer 2 w0.35: v1(-11.591,3.106) -10.625,2.847 ; v1(-11.413,-3.708) -10.462,-3.399 ; v1(-10.937,3.554) -9.986,3.245 ; v1(-10.736,-4.121) -9.803,-3.763 ; v1(-9.326,7.552) -8.549,6.923 ; v1(-8.918,-8.03) -8.175,-7.36 ; v1(-2.495,11.738) -2.287,10.76 ; v1(-1.877,-11.852) -1.721,-10.865 ; 1.643,10.371 v1(1.799,11.358) ; 2.183,-10.271 v1(2.391,-11.249) ; 2.287,10.76 v1(2.495,11.738) ; 2.847,-10.625 v1(3.106,-11.591) ; 7.778,7.778 v1(8.485,8.485) ; 7.803,7.026 v1(8.546,7.695) ; 8.16,-6.608 v1(8.937,-7.237) ; 8.175,-7.36 v1(8.918,-8.03) ; 10.269,3.942 v1(11.203,4.3) ; 10.462,-3.399 v1(11.413,-3.708)
  Mid-Layer 2 w0.5: v1(-19.138,-7.347) -21.25,-6.161 -21.25,6.161 v1(-19.138,7.347) ; v1(-18.728,-8.338) -21.965,-6.82 -21.965,6.82 v1(-18.728,8.338) ; v1(-18.266,-9.307) -22.825,-7.416 -22.825,7.416 v1(-18.266,9.307) ; -15.477,-19.633 v1(-10.25,-17.754) ; v1(-12.901,15.931) -12.14,19.24 -10.593,20.133 v1(-7.347,19.138) ; -12.25,0 v1(-11.996,-0.314) ; -12.233,-0.641 v1(-11.996,-0.314) ; v1(-12.05,16.585) -11.495,18.758 -10.497,19.334 v1(-8.338,18.728) ; v1(-11.496,-0.301) v1(-11.996,-0.314) ; v1(-11.165,17.193) -10.865,18.262 -10.383,18.541 v1(-9.307,18.266) ; -10.625,2.847 -10.453,2.51 -10.307,-3.053 -10.462,-3.399 ; -9.986,3.245 -9.692,2.462 -9.55,-2.965 -9.803,-3.763 ; -8.549,6.923 -7.163,6.978 -2.965,9.55 -2.287,10.76 ; v1(-8.546,7.695) -7.501,7.7 -3.455,10.179 v1(-2.976,11.108) ; -8.175,-7.36 -6.788,-7.343 -2.462,-9.692 -1.721,-10.865 ; v1(-8.132,-8.132) -7.088,-8.082 -2.918,-10.346 v1(-2.391,-11.249) ; -6.672,10.274 v1(-6.27,10.232) ; -6.125,-10.609 v1(-5.726,-10.546) ; -6.125,10.609 v1(-6.27,10.232) ; v1(-6.009,9.805) v1(-6.27,10.232) ; -5.561,-10.915 v1(-5.726,-10.546) ; v1(-5.487,-10.106) v1(-5.726,-10.546) ; -3.911,24.692 v1(0,20.5) ; v1(1.073,-20.472) 4.99,-23.475 17.835,-16.059 v1(17.193,-11.165) ; v1(1.073,20.472) 4.99,23.475 17.835,16.059 v1(17.193,11.165) ; 1.643,10.371 2.207,9.753 6.978,7.163 7.803,7.026 ; v1(2.143,-20.388) 5.076,-22.433 16.889,-15.612 v1(16.585,-12.05) ; v1(2.143,20.388) 5.076,22.433 16.889,15.612 v1(16.585,12.05) ; 2.183,-10.271 2.714,-9.625 7.343,-6.788 8.16,-6.608 ; 2.287,10.76 2.51,10.453 7.4,7.798 7.778,7.778 ; 2.847,-10.625 3.053,-10.307 7.798,-7.4 8.175,-7.36 ; v1(3.207,-20.248) 5.29,-21.483 15.96,-15.323 v1(15.931,-12.901) ; v1(3.207,20.248) 5.29,21.483 15.96,15.323 v1(15.931,12.901) ; v1(5.487,10.106) v1(5.726,10.546) ; 5.561,10.915 v1(5.726,10.546) ; v1(6.009,-9.805) v1(6.27,-10.232) ; 6.125,-10.609 v1(6.27,-10.232) ; 6.125,10.609 v1(5.726,10.546) ; 6.672,-10.274 v1(6.27,-10.232) ; 10.269,3.942 9.625,2.714 9.753,-2.207 10.462,-3.399 ; v1(10.937,3.554) 10.419,2.646 10.543,-2.097 v1(11.108,-2.976) ; v1(11.496,0.301) v1(11.996,0.314) ; 12.233,0.641 v1(11.996,0.314) ; 12.25,0 v1(11.996,0.314) ; v1(20.248,-3.207) 22.732,-0.893 22.732,0.893 v1(20.248,3.207) ; v1(20.388,-2.143) 21.992,-0.576 21.992,0.576 v1(20.388,2.143) ; v1(20.472,-1.073) 21.248,-0.278 21.248,0.278 v1(20.472,1.073)
  Mid-Layer 2 w1: -15.477,-19.633 cw(c0,0) -3.911,24.692 ccw(c0,0) -15.477,-19.633
  Bottom Layer w0.2: v1(-20.5,0) -12.25,0 ; v1(-20.472,-1.073) -12.233,-0.641 ; v1(-20.472,1.073) v1(-11.984,0.628) ; v1(-20.388,-2.143) v1(-11.934,-1.254) ; v1(-20.388,2.143) v1(-11.437,1.202) ; v1(-20.248,-3.207) v1(-11.358,-1.799) ; v1(-20.248,3.207) v1(-11.852,1.877) ; v1(-20.052,-4.262) v1(-11.738,-2.495) ; v1(-20.052,4.262) v1(-11.249,2.391) ; v1(-19.801,-5.306) v1(-11.108,-2.976) ; v1(-19.801,5.306) v1(-11.591,3.106) ; v1(-19.497,-6.335) v1(-11.413,-3.708) ; v1(-19.497,6.335) v1(-10.937,3.554) ; v1(-19.138,-7.347) v1(-10.736,-4.121) ; v1(-19.138,7.347) v1(-11.203,4.3) ; v1(-18.728,-8.338) v1(-10.963,-4.881) ; v1(-18.728,8.338) v1(-10.506,4.677) ; v1(-18.266,-9.307) v1(-10.247,-5.221) ; v1(-18.266,9.307) v1(-10.692,5.448) ; v1(-17.754,-10.25) v1(-10.392,-6) ; v1(-17.754,10.25) v1(-9.959,5.75) ; v1(-17.193,-11.165) v1(-9.645,-6.263) ; v1(-17.193,11.165) v1(-10.064,6.536) ; v1(-16.585,-12.05) v1(-9.708,-7.053) ; v1(-16.585,12.05) v1(-9.304,6.76) ; v1(-15.931,-12.901) v1(-8.937,-7.237) ; v1(-15.931,12.901) v1(-9.326,7.552) ; v1(-15.234,-13.717) v1(-8.918,-8.03) ; v1(-15.234,13.717) v1(-8.546,7.695) ; v1(-14.496,-14.496) v1(-8.132,-8.132) ; v1(-14.496,14.496) v1(-8.485,8.485) ; v1(-13.717,-15.234) v1(-8.03,-8.918) ; v1(-13.717,15.234) v1(-7.695,8.546) ; v1(-12.901,-15.931) v1(-7.237,-8.937) ; v1(-12.901,15.931) v1(-7.552,9.326) ; v1(-12.05,-16.585) v1(-7.053,-9.708) ; v1(-12.05,16.585) v1(-6.76,9.304) ; v1(-11.165,-17.193) v1(-6.263,-9.645) ; v1(-11.165,17.193) -6.672,10.274 ; v1(-10.25,-17.754) -6.125,-10.609 ; v1(-10.25,17.754) -6.125,10.609 ; v1(-9.307,-18.266) -5.561,-10.915 ; v1(-9.307,18.266) v1(-5.221,10.247) ; v1(-8.338,-18.728) v1(-4.677,-10.506) ; v1(-8.338,18.728) v1(-4.881,10.963) ; v1(-7.347,-19.138) v1(-4.3,-11.203) ; v1(-7.347,19.138) v1(-4.121,10.736) ; v1(-6.335,-19.497) v1(-3.554,-10.937) ; v1(-6.335,19.497) v1(-3.708,11.413) ; v1(-5.306,-19.801) v1(-3.106,-11.591) ; v1(-5.306,19.801) v1(-2.976,11.108) ; v1(-4.262,-20.052) v1(-2.391,-11.249) ; v1(-4.262,20.052) v1(-2.495,11.738) ; v1(-3.207,-20.248) v1(-1.877,-11.852) ; v1(-3.207,20.248) v1(-1.799,11.358) ; v1(-2.143,-20.388) v1(-1.202,-11.437) ; v1(-2.143,20.388) v1(-1.254,11.934) ; v1(-1.073,-20.472) v1(-0.628,-11.984) ; v1(-1.073,20.472) v1(-0.602,11.484) ; v1(0,-20.5) v1(0,-11.5) ; v1(0,12) v1(0,20.5) ; v1(0.602,11.484) v1(1.073,20.472) ; v1(0.628,-11.984) v1(1.073,-20.472) ; v1(1.202,-11.437) v1(2.143,-20.388) ; v1(1.254,11.934) v1(2.143,20.388) ; v1(1.799,11.358) v1(3.207,20.248) ; v1(1.877,-11.852) v1(3.207,-20.248) ; v1(2.391,-11.249) v1(4.262,-20.052) ; v1(2.495,11.738) v1(4.262,20.052) ; v1(2.976,11.108) v1(5.306,19.801) ; v1(3.106,-11.591) v1(5.306,-19.801) ; v1(3.554,-10.937) v1(6.335,-19.497) ; v1(3.708,11.413) v1(6.335,19.497) ; v1(4.121,10.736) v1(7.347,19.138) ; v1(4.3,-11.203) v1(7.347,-19.138) ; v1(4.677,-10.506) v1(8.338,-18.728) ; v1(4.881,10.963) v1(8.338,18.728) ; v1(5.448,-10.692) v1(9.307,-18.266) ; 5.561,10.915 v1(9.307,18.266) ; 6.125,-10.609 v1(10.25,-17.754) ; 6.125,10.609 v1(10.25,17.754) ; v1(6.536,10.064) v1(11.165,17.193) ; 6.672,-10.274 v1(11.165,-17.193) ; v1(6.76,9.304) v1(12.05,16.585) ; v1(7.053,-9.708) v1(12.05,-16.585) ; v1(7.237,-8.937) v1(12.901,-15.931) ; v1(7.552,9.326) v1(12.901,15.931) ; v1(7.695,8.546) v1(13.717,15.234) ; v1(8.03,-8.918) v1(13.717,-15.234) ; v1(8.132,-8.132) v1(14.496,-14.496) ; v1(8.485,8.485) v1(14.496,14.496) ; v1(8.546,7.695) v1(15.234,13.717) ; v1(8.918,-8.03) v1(15.234,-13.717) ; v1(8.937,-7.237) v1(15.931,-12.901) ; v1(9.304,6.76) v1(16.585,12.05) ; v1(9.326,7.552) v1(15.931,12.901) ; v1(9.645,-6.263) v1(17.193,-11.165) ; v1(9.708,-7.053) v1(16.585,-12.05) ; v1(9.959,5.75) v1(17.754,10.25) ; v1(10.064,6.536) v1(17.193,11.165) ; v1(10.247,-5.221) v1(18.266,-9.307) ; v1(10.392,-6) v1(17.754,-10.25) ; v1(10.506,4.677) v1(18.728,8.338) ; v1(10.692,5.448) v1(18.266,9.307) ; v1(10.736,-4.121) v1(19.138,-7.347) ; v1(10.937,3.554) v1(19.497,6.335) ; v1(10.963,-4.881) v1(18.728,-8.338) ; v1(11.108,-2.976) v1(19.801,-5.306) ; v1(11.203,4.3) v1(19.138,7.347) ; v1(11.249,2.391) v1(20.052,4.262) ; v1(11.358,-1.799) v1(20.248,-3.207) ; v1(11.413,-3.708) v1(19.497,-6.335) ; v1(11.437,1.202) v1(20.388,2.143) ; v1(11.484,-0.602) v1(20.472,-1.073) ; v1(11.591,3.106) v1(19.801,5.306) ; v1(11.738,-2.495) v1(20.052,-4.262) ; v1(11.852,1.877) v1(20.248,3.207) ; v1(11.934,-1.254) v1(20.388,-2.143) ; 12.233,0.641 v1(20.472,1.073) ; 12.25,0 v1(20.5,0)
  Bottom Layer w0.35: v1(-10.692,5.448) -9.801,4.994 ; v1(-10.392,-6) -9.526,-5.5 ; v1(-10.064,6.536) -9.225,5.991 ; v1(-9.708,-7.053) -8.899,-6.466 ; v1(-1.254,11.934) -1.15,10.94 ; v1(-0.628,-11.984) -0.576,-10.985 ; 0,11 v1(0,12) ; 0.576,-10.985 v1(0.628,-11.984) ; 9.225,5.991 v1(10.064,6.536) ; 9.526,-5.5 v1(10.392,-6) ; 9.801,4.994 v1(10.692,5.448) ; 10.049,-4.474 v1(10.963,-4.881)
  Bottom Layer w0.5: -24.741,3.587 v1(-20.5,0) ; v1(-17.193,-11.165) -17.835,-16.059 -4.99,-23.475 v1(-1.073,-20.472) ; v1(-17.193,11.165) -17.835,16.059 -4.99,23.475 v1(-1.073,20.472) ; v1(-16.585,-12.05) -16.889,-15.612 -5.076,-22.433 v1(-2.143,-20.388) ; v1(-16.585,12.05) -16.889,15.612 -5.076,22.433 v1(-2.143,20.388) ; v1(-15.931,-12.901) -15.96,-15.323 -5.29,-21.483 v1(-3.207,-20.248) ; v1(-15.931,12.901) -15.96,15.323 -5.29,21.483 v1(-3.207,20.248) ; -12.25,0 v1(-11.996,-0.314) ; -12.233,-0.641 v1(-11.996,-0.314) ; v1(-11.984,0.628) -11.741,0.461 -10.991,0.432 -10.76,0.228 -10.733,-0.791 -10.954,-1.007 -11.701,-1.075 v1(-11.934,-1.254) ; v1(-11.496,-0.301) v1(-11.996,-0.314) ; v1(-11.437,1.202) -10.691,1.124 -10.017,0.503 -9.977,-1.027 -10.618,-1.682 v1(-11.358,-1.799) ; -9.801,4.994 -9.294,2.176 -9.197,-2.771 -9.526,-5.5 ; v1(-9.304,6.76) -8.638,6.81 -2.146,10.789 v1(-1.799,11.358) ; -9.225,5.991 -8.213,6.133 -1.736,10.102 -1.15,10.94 ; v1(-8.937,-7.237) -8.27,-7.253 -1.578,-10.886 v1(-1.202,-11.437) ; -8.899,-6.466 -7.881,-6.554 -1.205,-10.179 -0.576,-10.985 ; -6.672,10.274 v1(-6.27,10.232) ; -6.125,-10.609 v1(-5.726,-10.546) ; -6.125,10.609 v1(-6.27,10.232) ; v1(-6.009,9.805) v1(-6.27,10.232) ; -5.561,-10.915 v1(-5.726,-10.546) ; v1(-5.487,-10.106) v1(-5.726,-10.546) ; 0,11 2.199,9.351 6.532,6.961 9.225,5.991 ; 0.576,-10.985 2.763,-9.137 6.999,-6.579 9.526,-5.5 ; v1(4.121,10.736) 3.852,10.036 4.099,9.153 5.444,8.423 6.319,8.697 v1(6.76,9.304) ; v1(4.262,-20.052) 7.678,-21.681 14.937,-17.489 v1(15.234,-13.717) ; v1(4.262,20.052) 7.678,21.681 14.937,17.489 v1(15.234,13.717) ; v1(4.677,-10.506) 4.372,-9.821 4.572,-8.926 5.878,-8.126 6.765,-8.354 v1(7.237,-8.937) ; v1(4.881,10.963) 4.919,10.671 4.605,9.99 4.681,9.69 5.577,9.204 5.87,9.303 6.27,9.937 v1(6.536,10.064) ; v1(5.306,-19.801) 7.701,-20.875 14.227,-17.107 v1(14.496,-14.496) ; v1(5.306,19.801) 7.701,20.875 14.227,17.107 v1(14.496,14.496) ; v1(5.448,-10.692) 5.471,-10.399 5.122,-9.735 5.182,-9.432 6.051,-8.9 6.349,-8.983 6.781,-9.596 v1(7.053,-9.708) ; v1(5.487,10.106) v1(5.726,10.546) ; 5.561,10.915 v1(5.726,10.546) ; v1(6.009,-9.805) v1(6.27,-10.232) ; 6.125,-10.609 v1(6.27,-10.232) ; 6.125,10.609 v1(5.726,10.546) ; v1(6.335,-19.497) 7.705,-20.072 13.53,-16.709 v1(13.717,-15.234) ; v1(6.335,19.497) 7.705,20.072 13.53,16.709 v1(13.717,15.234) ; 6.672,-10.274 v1(6.27,-10.232) ; 9.801,4.994 9.418,4.046 9.616,-3.548 10.049,-4.474 ; v1(10.506,4.677) 10.217,4.076 10.416,-3.536 v1(10.736,-4.121) ; v1(11.496,0.301) v1(11.996,0.314) ; 12.233,0.641 v1(11.996,0.314) ; 12.25,0 v1(11.996,0.314) ; v1(17.754,10.25) 19.429,15.733 ; v1(18.266,-9.307) 22.825,-7.416 22.825,7.416 v1(18.266,9.307) ; v1(18.728,-8.338) 21.965,-6.82 21.965,6.82 v1(18.728,8.338) ; v1(19.138,-7.347) 21.25,-6.161 21.25,6.161 v1(19.138,7.347)
  Bottom Layer w1: -24.741,3.587 cw(c0,0) 19.429,15.733 ccw(c0,0) -24.741,3.587
  other v1: 20.5,0 -17.754,10.25 17.754,10.25 -10.25,17.754 10.25,17.754
GND: R1.1 R2.1 R3.1 | length 3
  Top Layer w0.381: R2.1 R1.1
  Top Layer w0.5: R3.1 R1.1 R1.1@1.005,-28.445
pads on no net: U1.1 U1.2 U1.3 U2.1 U2.2 U2.3 U3.1 U3.2 U3.3

## Silkscreen, mask and mechanical layers (free items; w line width, h text height)
Mechanical 1:
  circle w0.2: c0,0 r12.5
  circle w0.2: c0,0 r20
  circle w0.2: c0,0 r5.5
  circle w0.2: c0,0 r12.5
  circle w0.2: c0,0 r20
  circle w0.2: c0,0 r5.5
Mechanical 13:
  circle w0.2: c0,0 r26